# Altium PCB Copy of PCB1.PcbDoc
Units mil, origin at the board's own origin, x right, y up, seen from the top; angles counter-clockwise.
Board outline 3585 x 2640 mil, 4 copper layers (Top01, GND02, PWR03, Bottom04), stack 23.756 mil thick; 60 components, 129 nets, 692 pads, 66 vias.
Unrouted connection lines stored in the file: 367.
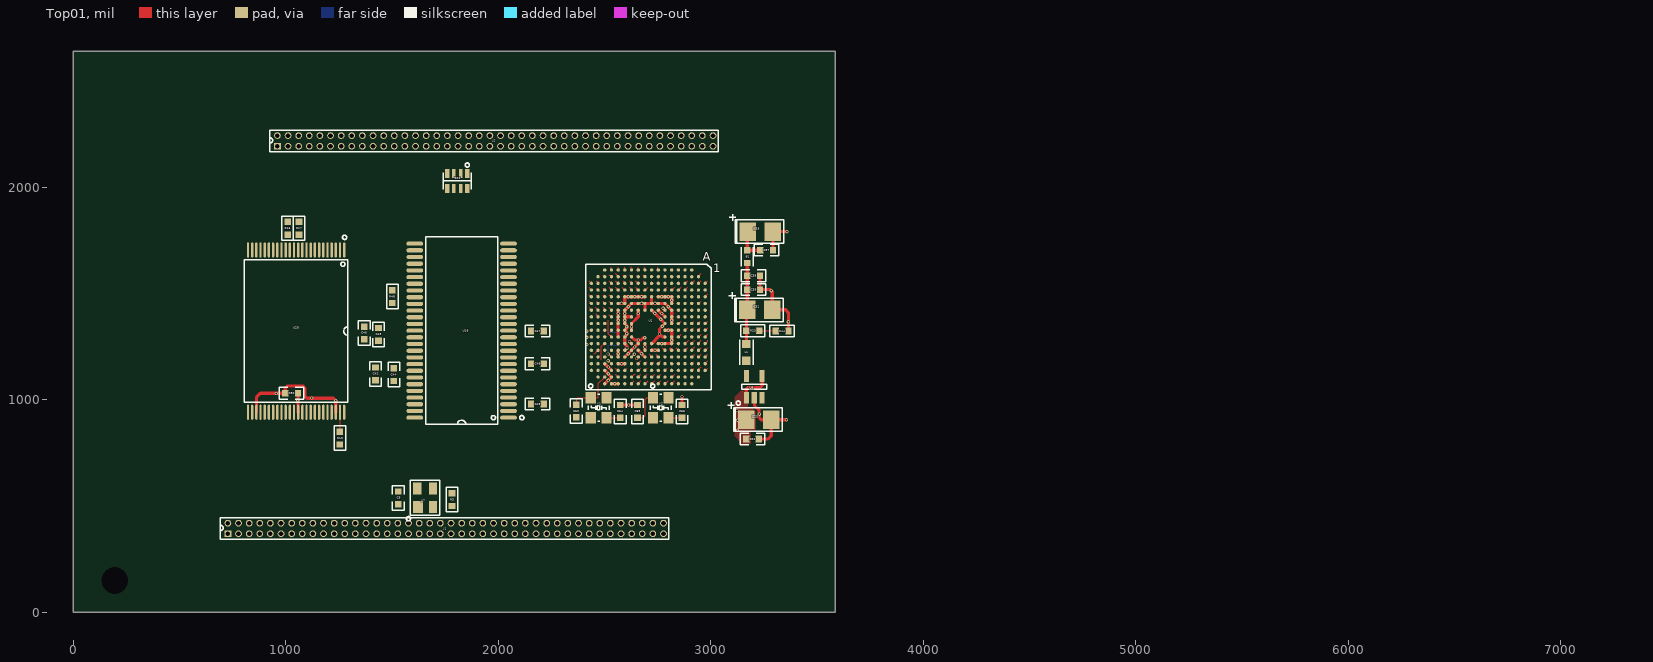
[diagram p0: Top01 view]
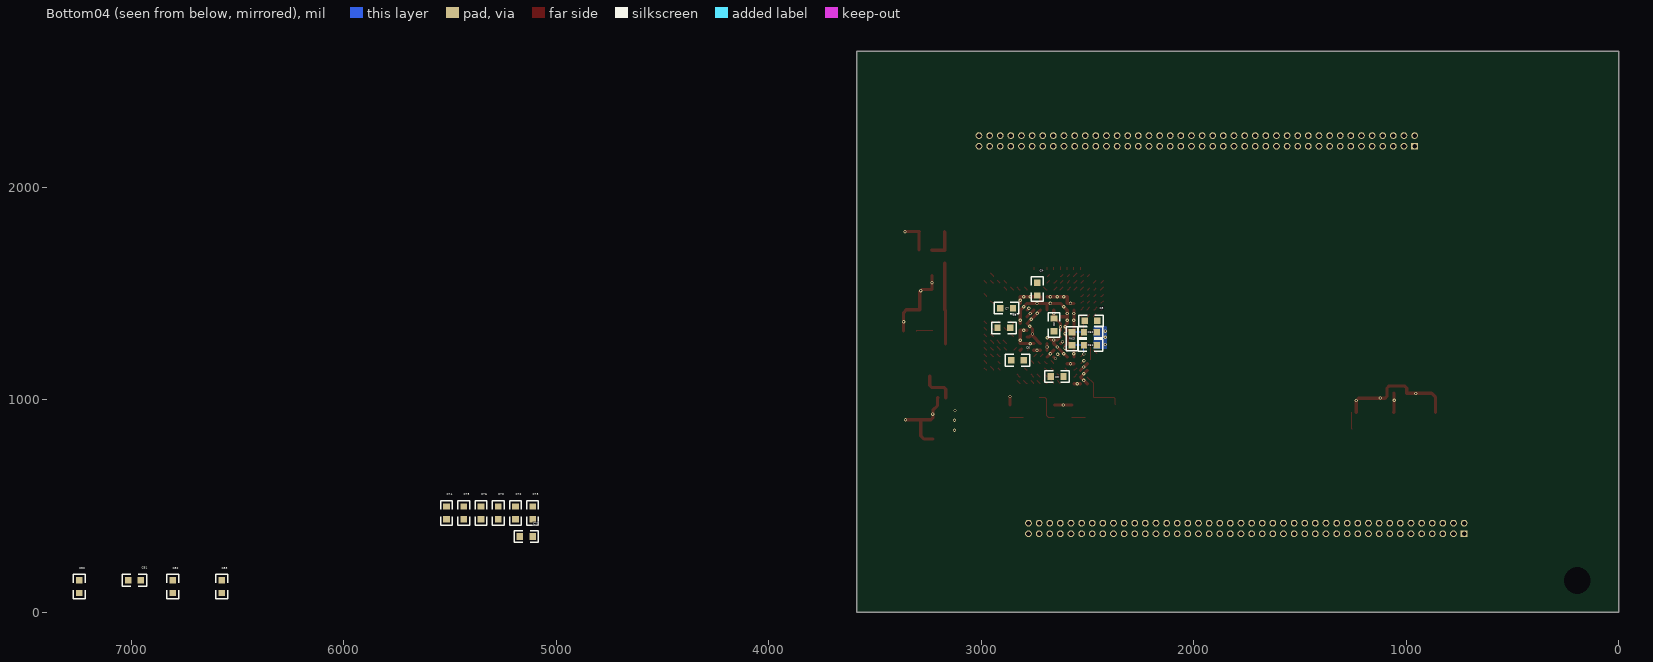
[diagram p1: Bottom04 view, seen from below]
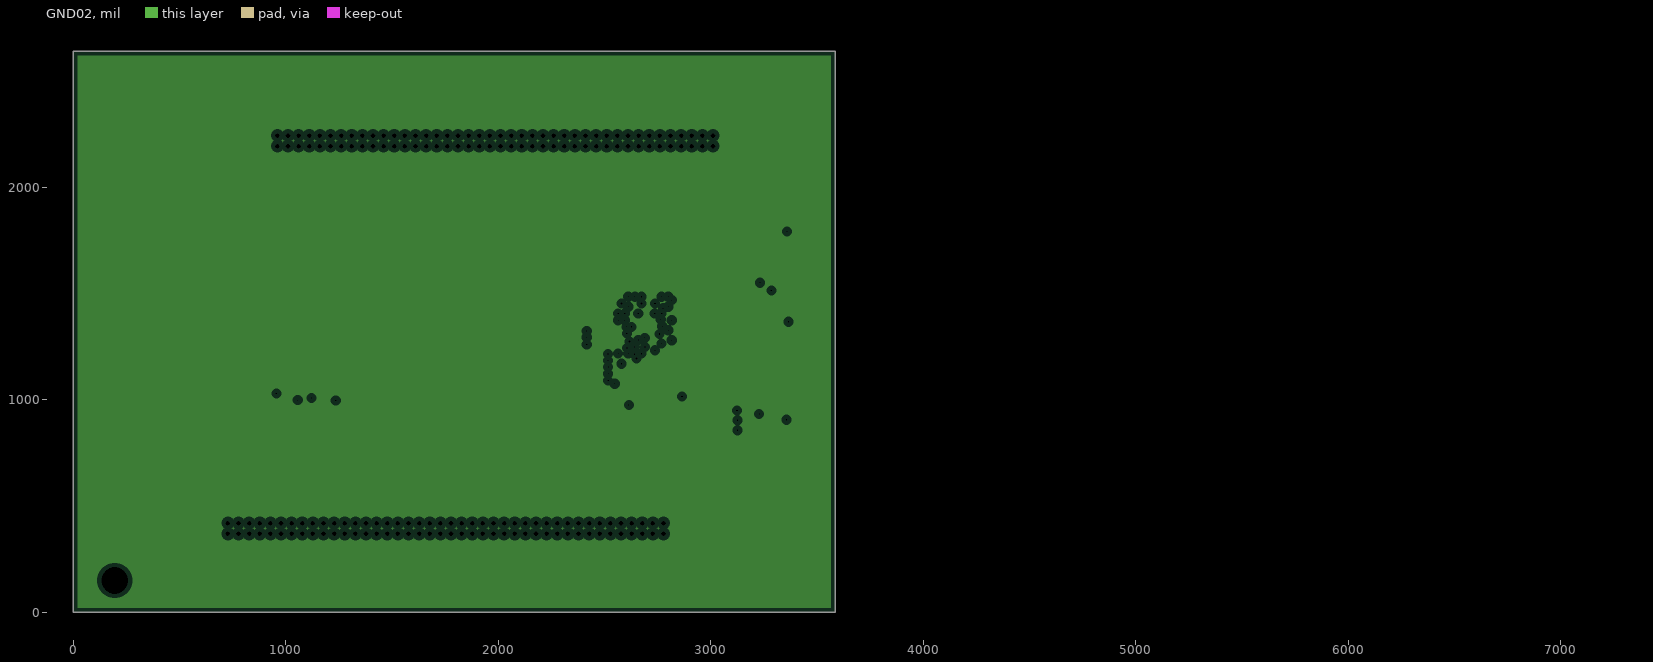
[diagram p2: GND02, clearances drawn from the general rule]
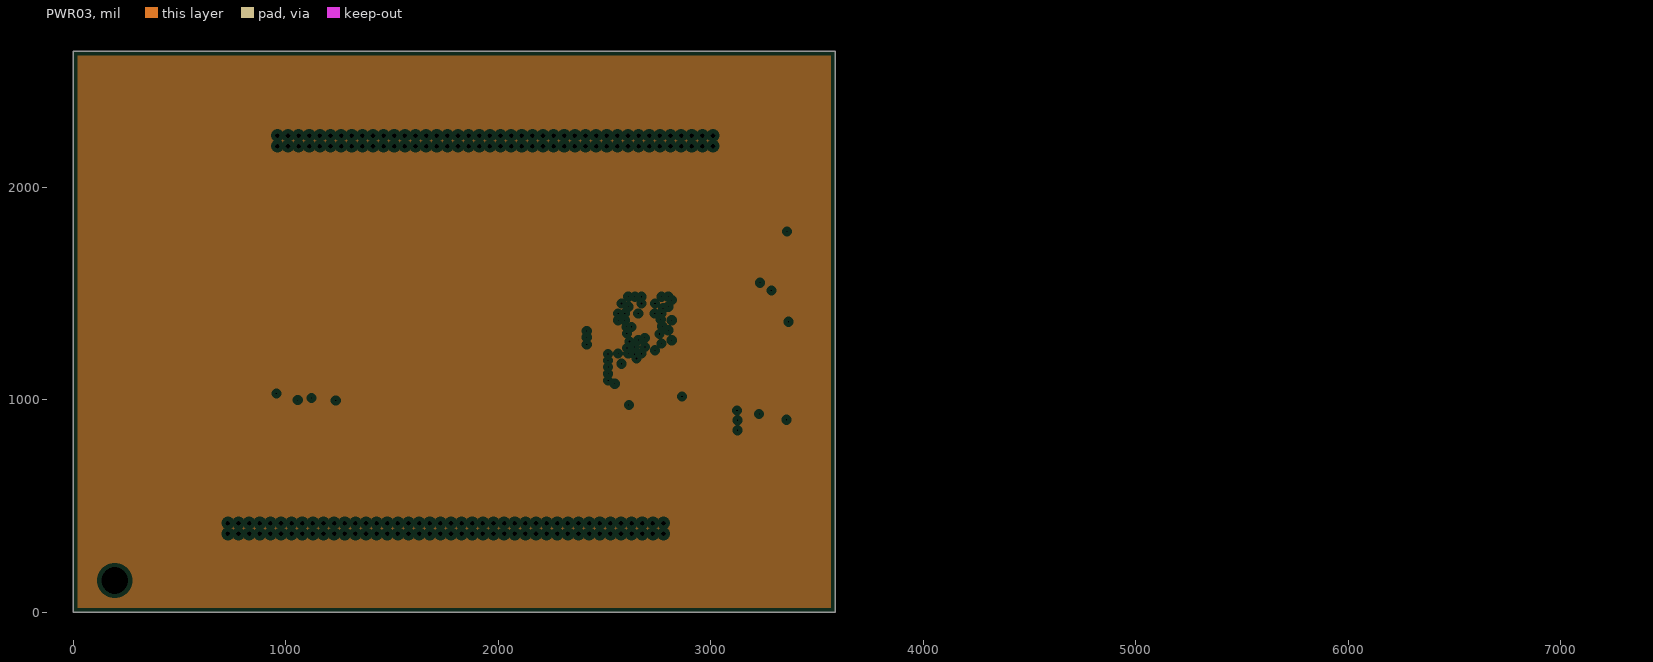
[diagram p3: PWR03, clearances drawn from the general rule]

## Layer stack, top to bottom
Top Solder: solder mask 0.4, Solder Resist, Dk 3.5
Top01: signal copper 1.4
Dielectric 2: prepreg 2.8, PP-006, Dk 4.1
GND02: plane copper 1.378
Dielectric 1: dielectric 12.6, FR-4, Dk 4.8
PWR03: plane copper 1.378
Dielectric 3: prepreg 2.8, PP-006, Dk 4.1
Bottom04: signal copper 1.4
Bottom Solder: solder mask 0.4, Solder Resist, Dk 3.5

## Board outline
0,0 0,2640 3585,2640 3585,0

## Design rules (kind name [scope] priority, off if disabled: settings)
Clearance PAD-PAD [All] p1: gap=5 ignorepadtopadclearanceinfootprint=TRUE
Clearance [All] p2: gap=0 ignorepadtopadclearanceinfootprint=FALSE
PlaneClearance [All] p1: clearance=20
PlaneConnect [All] p1: planeconnectstyle=Direct reliefexpansion=20 reliefentries=4 reliefconductorwidth=10 reliefairgap=10
PolygonConnect [All] p1: connectstyle=Direct reliefconductorwidth=10 reliefentries=4 polygonreliefangle="90 Angle" airgapwidth=10
RoutingVias [All] p1: holewidth=8 width=16 viastyle="Through Hole" minholewidth=8 minwidth=16 maxholewidth=8 maxwidth=16
SolderMaskExpansion [All] p1: expansion=4
Width PWR [InNetClass('PWR')] p1: maxlimit=40 minlimit=10 preferedwidth=15
Width [All] p2: maxlimit=10 minlimit=5 preferedwidth=5
28 further rules are at their usual default settings.

## Classes and differential pairs
net class PWR: 1V2 1V2_PLL 3V3 GND
net class D[0..31]: D0 D1 D2 D3 D4 D5 D6 D7 D8 D9 D10 D11 D12 D13 D14 D15 D16 D17 D18 D19 D20 D21 D22 D23 D24 D25 D26 D27 D28 D29 D30 D31
net class A[0..23]: A0 A1 A2 A3 A4 A5 A6 A7 A8 A9 A10 A11 A12 A13 A14 A15 A16 A17 A18 A19 A20 A21 A22 A23
component class SDRAM: C42 C44 C45 C46 C47 C48 C49 R48 U16
component class INTERFACE: B1 C9 C22 C23 C31 C33 C35 C37 C39 J1 J2 L1 R3 R23 R44 U7 U8
component class FLASH: C30 C63 C64 C65 C66 R15 R16 R17 U20 Y1 Y2
component class EMC: U1
component class CPU: RP1
component class 01: C61 C62 R63

## Components (designator, comment, footprint, x,y, rotation, side; value= is the part's Value field where it differs from the comment)
B1 "B" 0603 3171,1673.92 r90 top
C2 "104" 0603C 2657,1353 r90 bottom
C3 "104" 0603C 2483,1372 r180 bottom
C4 "104" 0603C 2736,1521 r90 bottom
C5 "104" 0603C 2893,1339 r180 bottom
C6 "104" 0603C 2829,1187 r180 bottom
C7 "104" 0603C 2880,1432 r180 bottom
C8 "104" 0603C 2641.92,1110 r180 bottom
C9 "104" 0603C 1529,539 r270 top
C22 "104" 0603C 3196,816 r0 top
C23 "22uF" TC-3528 3225.06,907 r0 top
C30 "104" 0603C 1027,1031 r180 top
C31 "10uF" TC-3528 3230.06,1424 r0 top
C33 "10uF" TC-3528 3232,1792 r0 top
C35 "103" 0603C 3200.92,1584 r0 top
C37 "104" 0603C 3262,1705 r0 top
C39 "104" 0603C 3200.92,1519 r0 top
C42 "104" 0603C 1421.56,1122.57 r90 top
C44 "103" 0603C 1508,1119.08 r90 top
C45 "104" 0603C 1435.51,1308.57 r90 top
C46 "104" 0603C 1369,1315.08 r90 top
C47 "104" 0603C 2183,1324 r0 top
C48 "104" 0603C 2183,1170 r0 top
C49 "104" 0603C 2183,981 r0 top
C61 "150pF 5%" 0603C 2486,1257 r180 bottom
C62 "3.9nF 5%" 0603C 2486,1319 r180 bottom
C63 "22pF" 0603C 2366,947.92 r270 top
C64 "22pF" 0603C 2573,946 r90 top
C65 "12pF" 0603C 2655,946 r90 top
C66 "12pF" 0603C 2864,946 r90 top
C70 "104" 0603C 5272.56,468.57 r90 bottom
C71 "104" 0603C 5140.43,357.62 r180 bottom
C72 "104" 0603C 5191.54,468.57 r90 bottom
C73 "104" 0603C 5110.51,468.57 r90 bottom
C74 "104" 0603C 5515.63,468.57 r90 bottom
C75 "104" 0603C 5434.61,468.57 r90 bottom
C76 "104" 0603C 5353.58,468.57 r90 bottom
C80 "104" 0603C 7244,121 r90 bottom
C81 "104" 0603C 6984,151 r180 bottom
C82 "104" 0603C 6804,121 r90 bottom
C83 "104" 0603C 6574,121 r90 bottom
J1 "CON_PLUG 42 x 2" DIP84 727,370 r90 top
J2 "CON_PLUG 42 x 2" DIP84 960,2194 r90 top
L1 "2.2uH" 0805 3167,1224 r90 top
R3 "470" 0603R 1782,531 r90 top
R15 "10K" 0603R 1254,820 r270 top
R16 "10K" 0603R 1008,1808 r90 top
R17 "10K" 0603R 1062,1808 r90 top
R23 "100K 1%" 0603R 3197,1325 r180 top
R44 "100K 1%" 0603R 3335,1324 r180 top
R48 "10K" 0603R 1501,1486.08 r90 top
R63 "120K 1%" 0603R 2572,1288 r90 bottom
RP1 "10K" PZ-4-0.8B 1806.25,2030.57 r180 top
U1 "LPC3250" TFBGA296 2705.21,1343.73 r270 top
U7 "MAX811" MAX811 1654.94,539.37 r0 top
U8 "SP6669" SOT-23-5 3204,1061 r0 top
U16 "HY57V561620CLT" TSSOP-54 1827,1326 r90 top
U20 "SST36VF1601" TSOP-48 1047.84,1323.89 r180 top
Y1 "13M" XTAL-D 2472,963 r270 top
Y2 "32.768K" XTAL-D 2764,963 r270 top

## Footprints (in the part's own frame and the unit in brackets; to place one, negate y for a bottom-side part, rotate by r counter-clockwise, add the part's x,y. Pads: shape width x height; smd on the part's side, far side on the other; paste and mask are expansions set on the pad)
0603 [mm]
  rect 0.76x0.8 smd: 1(-0.76,0) 2(0.76,0)
  silkscreen extent -1.15,-0.7 1.15,0.7
0603C [mm]
  rect 0.76x0.8 smd: 1(-0.76,0) 2(0.76,0)
  silkscreen extent -1.46,-0.7 1.46,0.7
0603R [mm]
  rect 0.76x0.8 smd: 1(-0.76,0) 2(0.76,0)
  silkscreen extent -1.46,-0.7 1.46,0.7
0805 [mm]
  rect 1x1 smd: 1(-1,0) 2(1,0)
  silkscreen extent -1.5,-0.8 1.5,0.8
DIP84 [mm]
  rect 0.8x0.8 hole 0.55: 1(0,0)
  round 0.8 hole 0.55: 2(1.27,0) 3(0,-1.27) 4(1.27,-1.27) 5(0,-2.54) 6(1.27,-2.54) 7(0,-3.81) 8(1.27,-3.81) 9(0,-5.08) 10(1.27,-5.08) 11(0,-6.35) 12(1.27,-6.35) 13(0,-7.62) 14(1.27,-7.62) 15(0,-8.89) 16(1.27,-8.89) 17(0,-10.16) 18(1.27,-10.16) 19(0,-11.43) 20(1.27,-11.43) 21(0,-12.7) 22(1.27,-12.7) 23(0,-13.97) 24(1.27,-13.97) 25(0,-15.24) 26(1.27,-15.24) 27(0,-16.51) 28(1.27,-16.51) 29(0,-17.78) 30(1.27,-17.78) 31(0,-19.05) 32(1.27,-19.05) 33(0,-20.32) 34(1.27,-20.32) 35(0,-21.59) 36(1.27,-21.59) 37(0,-22.86) 38(1.27,-22.86) 39(0,-24.13) 40(1.27,-24.13) 41(0,-25.4) 42(1.27,-25.4) 43(0,-26.67) 44(1.27,-26.67) 45(0,-27.94) 46(1.27,-27.94) 47(0,-29.21) 48(1.27,-29.21) 49(0,-30.48) 50(1.27,-30.48) 51(0,-31.75) 52(1.27,-31.75) 53(0,-33.02) 54(1.27,-33.02) 55(0,-34.29) 56(1.27,-34.29) 57(0,-35.56) 58(1.27,-35.56) 59(0,-36.83) 60(1.27,-36.83) 61(0,-38.1) 62(1.27,-38.1) 63(0,-39.37) 64(1.27,-39.37) 65(0,-40.64) 66(1.27,-40.64) 67(0,-41.91) 68(1.27,-41.91) 69(0,-43.18) 70(1.27,-43.18) 71(0,-44.45) 72(1.27,-44.45) 73(0,-45.72) 74(1.27,-45.72) 75(0,-46.99) 76(1.27,-46.99) 77(0,-48.26) 78(1.27,-48.26) 79(0,-49.53) 80(1.27,-49.53) 81(0,-50.8) 82(1.27,-50.8) 83(0,-52.07) 84(1.27,-52.07)
  silkscreen extent -0.64,-52.7 1.91,0.89
MAX811 [mm]
  rect 1.2x1.4 smd: 1(-0.85,-1.1)
  rect 1x1.4 smd: 2(0.95,-1.1) 3(0.95,1.1) 4(-0.95,1.1)
  silkscreen extent -2.23,-2.74 1.75,2.1
PZ-4-0.8B [mm]
  rect 0.5x1.1 smd: 1(-1.2,-0.9) 4(1.2,-0.9) 5(1.2,0.9) 8(-1.2,0.9)
  rect 0.4x1.1 smd: 2(-0.4,-0.9) 3(0.4,-0.9) 6(0.4,0.9) 7(-0.4,0.9)
  silkscreen extent -1.7,-2.15 1.7,1
SOT-23-5 [mm]
  rect 0.6x1.4 smd: 1(-0.95,-1.3) 2(0,-1.3) 3(0.95,-1.3) 4(0.95,1.3) 5(-0.95,1.3)
  silkscreen extent -2.15,-2.18 1.5,0.3
TC-3528 [mm]
  rect 2x2.2 smd: 1(-1.5,0) 2(1.5,0)
  silkscreen extent -3.7,-1.4 2.8,2.1
TFBGA296 [mm]
  round 0.4 smd: A3(-5.2,6.8) A4(-4.4,6.8) A5(-3.6,6.8) A6(-2.8,6.8) A7(-2,6.8) A8(-1.2,6.8) A9(-0.4,6.8) A10(0.4,6.8) A11(1.2,6.8) A12(2,6.8) A13(2.8,6.8) A14(3.6,6.8) A15(4.4,6.8) A16(5.2,6.8) B2(-6,6) B3(-5.2,6) B4(-4.4,6) B5(-3.6,6) B6(-2.8,6) B7(-2,6) B8(-1.2,6) B9(-0.4,6) B10(0.4,6) B11(1.2,6) B12(2,6) B13(2.8,6) B14(3.6,6) B15(4.4,6) B16(5.2,6) B17(6,6) C1(-6.8,5.2) C2(-6,5.2) C3(-5.2,5.2) C4(-4.4,5.2) C5(-3.6,5.2) C6(-2.8,5.2) C7(-2,5.2) C8(-1.2,5.2) C9(-0.4,5.2) C10(0.4,5.2) C11(1.2,5.2) C12(2,5.2) C13(2.8,5.2) C14(3.6,5.2) C15(4.4,5.2) C16(5.2,5.2) C17(6,5.2) C18(6.8,5.2) D1(-6.8,4.4) D2(-6,4.4) D3(-5.2,4.4) D4(-4.4,4.4) D5(-3.6,4.4) D6(-2.8,4.4) D7(-2,4.4) D8(-1.2,4.4) D9(-0.4,4.4) D10(0.4,4.4) D11(1.2,4.4) D12(2,4.4) D13(2.8,4.4) D14(3.6,4.4) D15(4.4,4.4) D16(5.2,4.4) D17(6,4.4) D18(6.8,4.4) E1(-6.8,3.6) E2(-6,3.6) E3(-5.2,3.6) E4(-4.4,3.6) E5(-3.6,3.6) E6(-2.8,3.6) E7(-2,3.6) E8(-1.2,3.6) E9(-0.4,3.6) E10(0.4,3.6) E11(1.2,3.6) E12(2,3.6) E13(2.8,3.6) E14(3.6,3.6) E15(4.4,3.6) E16(5.2,3.6) E17(6,3.6) E18(6.8,3.6) F1(-6.8,2.8) F2(-6,2.8) F3(-5.2,2.8) F4(-4.4,2.8) F5(-3.6,2.8) F6(-2.8,2.8) F7(-2,2.8) F8(-1.2,2.8) F9(-0.4,2.8) F10(0.4,2.8) F11(1.2,2.8) F12(2,2.8) F13(2.8,2.8) F14(3.6,2.8) F15(4.4,2.8) F16(5.2,2.8) F17(6,2.8) F18(6.8,2.8) G1(-6.8,2) G2(-6,2) G3(-5.2,2) G4(-4.4,2) G5(-3.6,2) G6(-2.8,2) G7(-2,2) G8(-1.2,2) G9(-0.4,2) G10(0.4,2) G11(1.2,2) G12(2,2) G13(2.8,2) G14(3.6,2) G15(4.4,2) G16(5.2,2) G17(6,2) G18(6.8,2) H1(-6.8,1.2) H2(-6,1.2) H3(-5.2,1.2) H4(-4.4,1.2) H5(-3.6,1.2) H6(-2.8,1.2) H7(-2,1.2) H12(2,1.2) H13(2.8,1.2) H14(3.6,1.2) H15(4.4,1.2) H16(5.2,1.2) H17(6,1.2) H18(6.8,1.2) J1(-6.8,0.4) J2(-6,0.4) J3(-5.2,0.4) J4(-4.4,0.4) J5(-3.6,0.4) J6(-2.8,0.4) J7(-2,0.4) J12(2,0.4) J13(2.8,0.4) J14(3.6,0.4) J15(4.4,0.4) J16(5.2,0.4) J17(6,0.4) J18(6.8,0.4) K1(-6.8,-0.4) K2(-6,-0.4) K3(-5.2,-0.4) K4(-4.4,-0.4) K5(-3.6,-0.4) K6(-2.8,-0.4) K7(-2,-0.4) K12(2,-0.4) K13(2.8,-0.4) K14(3.6,-0.4) K15(4.4,-0.4) K16(5.2,-0.4) K17(6,-0.4) K18(6.8,-0.4) L1(-6.8,-1.2) L2(-6,-1.2) L3(-5.2,-1.2) L4(-4.4,-1.2) L5(-3.6,-1.2) L6(-2.8,-1.2) L7(-2,-1.2) L12(2,-1.2) L13(2.8,-1.2) L14(3.6,-1.2) L15(4.4,-1.2) L16(5.2,-1.2) L17(6,-1.2) L18(6.8,-1.2) M1(-6.8,-2) M2(-6,-2) M3(-5.2,-2) M4(-4.4,-2) M5(-3.6,-2) M6(-2.8,-2) M7(-2,-2) M8(-1.2,-2) M9(-0.4,-2) M10(0.4,-2) M11(1.2,-2) M12(2,-2) M13(2.8,-2) M14(3.6,-2) M15(4.4,-2) M16(5.2,-2) M17(6,-2) M18(6.8,-2) N1(-6.8,-2.8) N2(-6,-2.8) N3(-5.2,-2.8) N4(-4.4,-2.8) N5(-3.6,-2.8) N6(-2.8,-2.8) N7(-2,-2.8) N8(-1.2,-2.8) N9(-0.4,-2.8) N10(0.4,-2.8) N11(1.2,-2.8) N12(2,-2.8) N13(2.8,-2.8) N14(3.6,-2.8) N15(4.4,-2.8) N16(5.2,-2.8) N17(6,-2.8) N18(6.8,-2.8) P1(-6.8,-3.6) P2(-6,-3.6) P3(-5.2,-3.6) P4(-4.4,-3.6) P5(-3.6,-3.6) P6(-2.8,-3.6) P7(-2,-3.6) P8(-1.2,-3.6) P9(-0.4,-3.6) P10(0.4,-3.6) P11(1.2,-3.6) P12(2,-3.6) P13(2.8,-3.6) P14(3.6,-3.6) P15(4.4,-3.6) P16(5.2,-3.6) P17(6,-3.6) P18(6.8,-3.6) R1(-6.8,-4.4) R2(-6,-4.4) R3(-5.2,-4.4) R4(-4.4,-4.4) R5(-3.6,-4.4) R6(-2.8,-4.4) R7(-2,-4.4) R8(-1.2,-4.4) R9(-0.4,-4.4) R10(0.4,-4.4) R11(1.2,-4.4) R12(2,-4.4) R13(2.8,-4.4) R14(3.6,-4.4) R15(4.4,-4.4) R16(5.2,-4.4) R17(6,-4.4) R18(6.8,-4.4) T1(-6.8,-5.2) T2(-6,-5.2) T3(-5.2,-5.2) T4(-4.4,-5.2) T5(-3.6,-5.2) T6(-2.8,-5.2) T7(-2,-5.2) T8(-1.2,-5.2) T9(-0.4,-5.2) T10(0.4,-5.2) T11(1.2,-5.2) T12(2,-5.2) T13(2.8,-5.2) T14(3.6,-5.2) T15(4.4,-5.2) T16(5.2,-5.2) T17(6,-5.2) T18(6.8,-5.2) U2(-6,-6) U3(-5.2,-6) U4(-4.4,-6) U5(-3.6,-6) U6(-2.8,-6) U7(-2,-6) U8(-1.2,-6) U9(-0.4,-6) U10(0.4,-6) U11(1.2,-6) U12(2,-6) U13(2.8,-6) U14(3.6,-6) U15(4.4,-6) U16(5.2,-6) U17(6,-6) V3(-5.2,-6.8) V4(-4.4,-6.8) V5(-3.6,-6.8) V6(-2.8,-6.8) V7(-2,-6.8) V8(-1.2,-6.8) V9(-0.4,-6.8) V10(0.4,-6.8) V11(1.2,-6.8) V12(2,-6.8) V13(2.8,-6.8) V14(3.6,-6.8) V15(4.4,-6.8) V16(5.2,-6.8)
  silkscreen extent -7.5,-7.5 7.5,7.5
TSOP-48 [mm]
  oval 0.28x1.8 smd: 1(-5.75,-9.7) 2(-5.25,-9.7) 3(-4.75,-9.7) 4(-4.25,-9.7) 5(-3.75,-9.7) 6(-3.25,-9.7) 7(-2.75,-9.7) 8(-2.25,-9.7) 9(-1.75,-9.7) 10(-1.25,-9.7) 11(-0.75,-9.7) 12(-0.25,-9.7) 13(0.25,-9.7) 14(0.75,-9.7) 15(1.25,-9.7) 16(1.75,-9.7) 17(2.25,-9.7) 18(2.75,-9.7) 19(3.25,-9.7) 20(3.75,-9.7) 21(4.25,-9.7) 22(4.75,-9.7) 23(5.25,-9.7) 24(5.75,-9.7) 25(5.75,9.7) 26(5.25,9.7) 27(4.75,9.7) 28(4.25,9.7) 29(3.75,9.7) 30(3.25,9.7) 31(2.75,9.7) 32(2.25,9.7) 33(1.75,9.7) 34(1.25,9.7) 35(0.75,9.7) 36(0.25,9.7) 37(-0.25,9.7) 38(-0.75,9.7) 39(-1.25,9.7) 40(-1.75,9.7) 41(-2.25,9.7) 42(-2.75,9.7) 43(-3.25,9.7) 44(-3.75,9.7) 45(-4.25,9.7) 46(-4.75,9.7) 47(-5.25,9.7) 48(-5.75,9.7)
  silkscreen extent -6.2,-11.45 6.2,8.5
TSSOP-54 [mm]
  oval 0.5x2 smd: 1(-10.4,-5.6) 2(-9.6,-5.6) 3(-8.8,-5.6) 4(-8,-5.6) 5(-7.2,-5.6) 6(-6.4,-5.6) 7(-5.6,-5.6) 8(-4.8,-5.6) 9(-4,-5.6) 10(-3.2,-5.6) 11(-2.4,-5.6) 12(-1.6,-5.6) 13(-0.8,-5.6) 14(0,-5.6) 15(0.8,-5.6) 16(1.6,-5.6) 17(2.4,-5.6) 18(3.2,-5.6) 19(4,-5.6) 20(4.8,-5.6) 21(5.6,-5.6) 22(6.4,-5.6) 23(7.2,-5.6) 24(8,-5.6) 25(8.8,-5.6) 26(9.6,-5.6) 27(10.4,-5.6) 28(10.4,5.6) 29(9.6,5.6) 30(8.8,5.6) 31(8,5.6) 32(7.2,5.6) 33(6.4,5.6) 34(5.6,5.6) 35(4.8,5.6) 36(4,5.6) 37(3.2,5.6) 38(2.4,5.6) 39(1.6,5.6) 40(0.8,5.6) 41(0,5.6) 42(-0.8,5.6) 43(-1.6,5.6) 44(-2.4,5.6) 45(-3.2,5.6) 46(-4,5.6) 47(-4.8,5.6) 48(-5.6,5.6) 49(-6.4,5.6) 50(-7.2,5.6) 51(-8,5.6) 52(-8.8,5.6) 53(-9.6,5.6) 54(-10.4,5.6)
  silkscreen extent -11.2,-7.45 11.2,4.3
XTAL-D [mm]
  rect 1.4x1.2 smd: 1(-1.2,-0.95) 2(1.2,0.95) 3(1.2,-0.95) 4(-1.2,0.95)
  silkscreen extent -2.84,-1.25 1.6,1.25

## Part data
C2 C3 C4 C5 C6 C7 C8 C9 C22 C30 C35 C37 C39 C42 C44 C45 C46 C47 C48 C49 C61 C62 C63 C64 C65 C66 C70 C71 C72 C73 C74 C75 C76 C80 C81 C82 C83: library part CAP
C23 C31 C33: library part CAP_1
L1: library part INDUCTOR
R3 R15 R16 R17 R23 R44 R48 R63: library part RES
RP1: library part RP
Y1 Y2: library part Y

## Free pads (board coordinates)
  round 0 hole 125.98: 67(195,150)

## Via types
v1: diameter 16, hole 8, Top01 to Bottom04, tented both sides, 66 vias

## Nets (pads, with @x,y where several pads share a name; then routed paths per layer and width w, separated by ;. In a path a pad name is that pad's centre, name@x,y a point inside that pad or via, vN(x,y) a via of type N, cw(c..) or ccw(c..) an arc to the next point about the centre after c; other vN are vias at no path point)
1V2: B1.1 C31.1 C35.1 C39.1 C70.1 C71.1 C72.1 C73.1 C74.1 C75.1 C76.1 L1.2 R23.2 U1.G7 U1.G9 U1.G11 U1.J7 U1.J12 U1.L12 U1.M7 U1.M11 U1.M13 U1.N14 | length 814.9
  Top01 w15: U1.N14 v1(2610.72,1217.75) U1.M13 v1(2642.21,1249.24) U1.L12 v1(2657.96,1281.96) ; U1.M11 2640.99,1281.96 v1(2657.96,1281.96) ; v1(2689,1292) 2681,1292 2670.96,1281.96 v1(2657.96,1281.96) ; U1.J12@2720.81,1265.14 U1.J12 2757.81,1301.85 2757.81,1309.81 v1(2758,1310) ; U1.J7 2764.21,1379.21 U1.G9 v1(2771.07,1346.6) 2758.19,1333.73 2758.19,1310.19 v1(2758,1310) ; v1(2775,1431) 2775.22,1431 2783.74,1422.47 U1.G7 ; U1.G11 2771.51,1296.49 v1(2758,1310) ; L1.2 L1.2 3167.04,1324.96 R23.2 3167.08,1420.08 C31.1 C39.1 C35.1 B1.1
  other v1: 2764,1379 2736,1407
1V2_PLL: B1.2 C33.1 C37.1 C80.1 C81.1 C82.1 C83.1 U1.K14 U1.L13 U1.N15 U1.P15 U1.R17 U1.T16 U1.T18 | length 315.6
  Top01 w15: U1.T18 v1(2516.23,1091.76) U1.R17 U1.T16 ; U1.P15 v1(2579.22,1170.5) U1.N15 ; U1.L13 U1.K14 ; C33.1 3171,1790.06 B1.2 3171.58,1704.42 3231.5,1704.42 C37.1
  other v1: 2516.23,1123.26 2673.71,1217.75
3V3: C2.1 C3.1 C4.1 C5.1 C6.1 C7.1 C8.1 C9.1 C22.1 C23.1 C30.1 C42.1 C44.1 C45.1 C46.1 C47.1 C48.1 C49.1 J1.81 J1.82 J1.83 J1.84 R15.2 R16.2 R17.2 RP1.5 RP1.6 RP1.7 RP1.8 U1.F7 U1.F8 U1.F9 U1.F13 U1.G6 U1.H6 U1.H13 U1.J5 U1.J6 U1.J13 U1.K6 U1.K7 U1.L6 U1.M6 U1.M8 U1.N7 U1.N8 U1.N9 U1.N10 U1.N11 U1.N12 U1.N13 U7.4 U8.1 U8.4 U16.1 U16.3 U16.9 U16.14 U16.27 U16.43 U16.49 U20.37 | length 914.5
  Top01 w15: C30.1 1057.3,1030.62 1057.3,942.38 U20.37 ; U1.N13 2594.97,1233.7 2605,1243.73 v1(2605,1244) 2604.81,1244.19 2604.81,1254.95 2594.97,1264.79 U1.N12 U1.N11 2595.17,1296.49 2604.6,1305.92 v1(2604.6,1312.14) 2604.6,1318.35 U1.N10 2594.97,1328.19 2604.4,1337.62 v1(2604.4,1343.83) 2604.4,1350.05 U1.N9 v1(2594.97,1375.23) U1.N8 ; U1.M8 U1.N8 ; U1.K7 U1.K6 ; U1.J13 v1(2736.7,1233.5) U1.H13 ; U1.J5 U1.J6 ; 2810,1240 2810,1239.14 2815.44,1233.7 U1.F13 ; U1.F9 v1(2815.44,1375.23) U1.F8 U1.F7 U1.G6 U1.H6 v1(2736.7,1453.97) U1.J6 ; U8.1 3166.6,1050.21 3175.39,1059 3233.21,1059 3242,1067.79 3242,1111.58 U8.4 ; U1.N8 v1(2594.97,1406.72) U1.N7 v1(2610.72,1438.22) U1.M6 U1.L6 v1(2673.71,1453.97) U1.K6 ; U1.K6 U1.J6
  other v1: 3125,857 3125,904 3123,950 1056,999 2799.69,1438.22
A0: U1.L3 U16.23 U20.25 | length 17.7
  Top01 w5: 2645,1560 2656.54,1548.46 U1.L3
A1: U1.L4 U16.24 U20.24 | length 18.4
  Top01 w5: 2645,1530 U1.L4 U1.L4
A2: U1.M1 U16.25 U20.23 | length 14.7
  Top01 w5: 2626,1626 2626,1611.91 U1.M1
A3: U1.M2 U16.26 U20.22 | length 15.6
  Top01 w5: 2615,1590 2625.05,1579.95 U1.M2
A4: U1.M3 U16.29 U20.21 | length 16.3
  Top01 w5: 2615,1560 U1.M3 U1.M3
A5: U1.N1 U16.30 U20.20 | length 13.6
  Top01 w5: U1.N1@2595,1611.48 2595,1625
A6: U1.N2 U16.31 U20.19 | length 14.2
  Top01 w5: 2585,1590 U1.N2 U1.N2
A7: U1.N3 U16.32 U20.18 | length 15.7
  Top01 w5: 2585,1560 2594.97,1550.03 U1.N3
A8: U1.M4 U16.33 U20.8 | length 17.8
  Top01 w5: 2615,1530 2626.46,1518.54 U1.M4
A9: U1.P1 U16.34 U20.7 | length 13.7
  Top01 w5: 2563,1625 2563,1611.92 U1.P1
A10: U1.P2 U16.22 U20.6 | length 20.6
  Top01 w5: 2550,1595 2563.47,1581.53 U1.P2
A11: U1.P3 U16.35 U20.5 | length 18.3
  Top01 w5: 2550,1560 2561.54,1548.46 U1.P3
A12: U1.N4 U16.36 U20.4 | length 20.4
  Top01 w5: 2580,1530 2593.04,1516.96 U1.N4
A13: U1.R1 U16.20 U20.3 | length 13.6
  Top01 w5: U1.R1@2532,1611.47 2532,1625
A14: U1.R2 U16.21 U20.2 | length 16.1
  Top01 w5: 2520,1590 2530.05,1579.95 U1.R2
A15: U1.L1 U20.1 | length 12.9
  Top01 w5: 2657,1624 2657,1612.41 U1.L1
A16: U1.K3 U20.48 | length 15.5
  Top01 w5: 2680,1560 2689.46,1550.54 U1.K3
A17: U1.K4 U20.17 | length 20.9
  Top01 w5: U1.K4 2691.96,1516.96 2705,1530
A18: U1.K2 U20.16 | length 14
  Top01 w5: 2680,1590 2689.46,1580.54 U1.K2
A19: U1.K1 U20.9 | length 13.7
  Top01 w5: 2689,1625 2689,1611.91 U1.K1
D0: U1.U4 U16.2 U20.29 | length 12.3
  Top01 w5: 2460,1525 2468.04,1516.96 U1.U4
D1: U1.R7 U16.4 U20.31 | length 17.5
  Top01 w5: 2520,1435 2531.98,1423.02 U1.R7
D2: U1.T5 U16.5 U20.33 | length 14.4
  Top01 w5: 2490,1495 2499.54,1485.46 U1.T5
D3: U1.U5 U16.7 U20.35 | length 13.3
  Top01 w5: 2460,1495 2468.98,1486.02 U1.U5
D4: U1.V3 U16.8 U20.38 | length 17.3
  Top01 w5: 2425,1560 2436.54,1548.46 U1.V3
D5: U1.V4 U16.10 U20.40 | length 18.2
  Top01 w5: 2425,1530 2437.49,1517.51 U1.V4
D6: U1.T6 U16.11 U20.42 | length 15.4
  Top01 w5: 2490,1465 2500.48,1454.52 U1.T6
D7: U1.R8 U16.13 U20.44 | length 15.7
  Top01 w5: 2520.04,1400 2529.07,1390.98 U1.R8
D8: U1.V5 U16.42 U20.30 | length 16.4
  Top01 w5: 2425,1495 2425.28,1495 2434.82,1485.46 U1.V5
D9: U1.U6 U16.44 U20.32 | length 14.8
  Top01 w5: 2460,1465 2468.98,1456.02 U1.U6
D10: U1.V6 U16.45 U20.34 | length 17.1
  Top01 w5: 2425,1465 2436.03,1453.97 U1.V6
D11: U1.T7 U16.47 U20.36 | length 16.9
  Top01 w5: 2490,1435 2500.48,1424.52 U1.T7
D12: U1.U7 U16.48 U20.39 | length 19.2
  Top01 w5: 2455,1435 2467.53,1422.47 U1.U7
D13: U1.V7 U16.50 U20.41 | length 17.7
  Top01 w5: 2425,1435 U1.V7
D14: U1.T8 U16.51 U20.43 | length 14.2
  Top01 w5: 2490,1400 2499.02,1390.98 U1.T8
D15: U1.U8 U16.53 U20.45 | length 17.7
  Top01 w5: 2460,1405 2460,1402.87 2468.98,1393.89 U1.U8
GND: C2.2 C3.2 C4.2 C5.2 C6.2 C7.2 C8.2 C9.2 C22.2 C23.2 C30.2 C31.2 C33.2 C35.2 C37.2 C39.2 C42.2 C44.2 C45.2 C46.2 C47.2 C48.2 C49.2 C61.2 C62.2 C63.2 C64.2 C65.2 C66.2 C70.2 C71.2 C72.2 C73.2 C74.2 C75.2 C76.2 C80.2 C81.2 C82.2 C83.2 J1.1 J1.2 J1.3 J1.4 J1.5 J1.6 J1.7 J1.8 J1.9 J1.10 J1.11 J1.12 J1.13 J1.14 J1.15 J1.16 J1.17 J1.18 J1.19 J1.20 J1.21 J1.22 J1.23 J1.24 J1.25 J1.26 J1.27 J1.28 J1.29 J1.30 J1.32 J1.33 J1.36 J1.41 J1.43 J1.47 J1.48 J1.49 J1.50 J1.51 J1.52 J1.53 J1.54 J1.55 J1.56 J1.79 J2.1 J2.2 J2.3 J2.4 J2.5 J2.6 J2.7 J2.8 J2.9 J2.10 J2.11 J2.12 J2.13 J2.14 J2.15 J2.16 J2.17 J2.18 J2.19 J2.20 J2.21 J2.22 J2.23 J2.24 J2.25 J2.26 J2.29 J2.30 J2.34 J2.36 J2.42 J2.45 J2.46 J2.48 J2.52 J2.54 J2.55 J2.56 J2.57 J2.58 J2.59 J2.60 J2.61 J2.62 J2.63 J2.64 J2.67 J2.71 J2.72 J2.73 J2.77 R44.1 R48.2 U1.F5 U1.F6 U1.F10 U1.F11 U1.F12 U1.G5 U1.G8 U1.G10 U1.G12 U1.H5 U1.H7 U1.H12 U1.K5 U1.K12 U1.K13 U1.L5 U1.L7 U1.L14 U1.M5 U1.M9 U1.M10 U1.M12 U1.N5 U1.N6 U1.P6 U1.P7 U1.P8 U1.P9 U1.P10 U1.P11 U1.P13 U1.P14 U1.P18 U1.R16 U1.R18 U1.T15 U7.1 U8.2 U16.6 U16.12 U16.28 U16.41 U16.46 U16.52 U16.54 U20.27 U20.46 | length 2472.6
  Top01 w15: U20.27 860.83,1011.83 880,1031 C30.2 997.08,1056.08 1006,1065 1081.21,1065 1090,1056.21 1090,1016.79 1098.79,1008 1224,1008 v1(1234.85,997.15) U20.46 ; U1.T15 U1.R16 ; U1.R18 v1(2547.72,1076.02) U1.P18 ; U1.P14 v1(2563.47,1217.75) U1.P13 ; U1.P11 U1.P10 U1.P9 v1(2563.47,1375.23) U1.P8 v1(2563.47,1406.72) U1.P7 ; U1.P6 v1(2579.22,1453.97) U1.N6 U1.N5 v1(2610.72,1485.46) U1.M5 v1(2642.21,1485.46) U1.L5 v1(2673.71,1485.46) U1.K5 ; C64.2 C65.2 ; v1@2617,1275 v1(2617,1274.66) 2626.46,1265.19 U1.M12 ; U1.M10 v1(2626.46,1343.73) U1.M9 2657.96,1390.98 v1(2657.96,1406.72) U1.L7 ; v1(2650,1195) 2650.76,1195 2657.76,1202 U1.L14 ; U1.K13 v1(2689.46,1249.24) U1.K12 ; U1.H12 v1(2768.2,1264.99) U1.G12 U1.F12 v1(2815.44,1280.74) U1.F11 U1.F10 v1(2799.69,1327.98) U1.G10 ; U1.H5 v1(2768.2,1485.46) U1.G5 v1(2799.69,1485.46) U1.F5 v1(2815.44,1469.72) U1.F6 ; U1.H7@2752.65,1422.47 U1.H7 U1.G8 ; C66.2 v1(2864,1016) ; U8.2 3205,1008.82 3205,973 3227,951 v1(3227,933.39) 3227,915.79 3235.79,907 C23.2 ; C22.2 3269,816 3284.11,831.11 C23.2 ; C35.2 v1(3230.84,1551.5) C39.2 3280,1519 v1(3284.56,1514.44) 3289.11,1509.89 C31.2 3352,1424 3364.92,1411.08 v1(3364.92,1367.54) R44.1 ; C37.2 3291.92,1791.13 C33.2 v1(3358,1792) ; v1(3356,907) C23.2
  other v1: 2614,975.92 1121,1009 955,1030 2516.23,1154.76 2416,1261 2416,1295 2416,1324 2768.2,1406.72
GPI_00: J1.73 U1.C16 | length 15.2
  Top01 w5: U1.C16 2909.93,1139.93 2920,1150
GPI_02: J2.70 U1.C14 | length 20.5
  Top01 w5: U1.C14 2912,1202 2925,1215
GPI_03: J2.28 U1.F4 | length 20
  Top01 w5: U1.F4 2816.96,1516.96 2830,1530
GPI_04: J1.76 U1.E13 | length 16.7
  Top01 w5: 2835,1245 2846.5,1233.5 U1.E13
GPI_05: J1.38 U1.N16 | length 15.1
  Top01 w5: U1.N16 2594.97,1139.97 2605,1150
GPI_07: J2.69 U1.D13 | length 16.3
  Top01 w5: U1.D13 2878.5,1233.5 2890,1245
GPI_08: J1.77 U1.B16 | length 21.6
  Top01 w5: U1.B16 2941.43,1141.43 2955,1155
GPI_16: J1.59 U1.J18 | length 19.8
  Top01 w5: U1.J18 U1.J18 2735,1090
GPI_22: J1.74 U1.G13 | length 18.7
  Top01 w5: 2770,1245 2781.5,1233.5 U1.G13
GPIO_00: J2.80 U1.A12 | length 20
  Top01 w5: U1.A12 2985,1277.07 2985,1280
GPIO_01: J2.78 U1.A11 | length 18.5
  Top01 w5: U1.A11 2972.92,1297.92 2985,1310
GPO_00: J2.33 U1.C3 | length 19.9
  Top01 w5: U1.C3 2921.47,1560 2925,1560
GPO_01: J2.39 U1.D4 | length 17.8
  Top01 w5: U1.D4 2878.43,1518.43 2890,1530
GPO_02: J2.83 U1.B14 | length 19
  Top01 w5: U1.B14 2942,1202 2955,1215
GPO_03: J2.66 U1.D12 | length 22.8
  Top01 w5: U1.D12 2879.99,1264.99 2895,1280
GPO_05: J2.37 U1.B3 | length 18.4
  Top01 w5: U1.B3 2943.46,1548.46 2955,1560
GPO_06: J1.78 U1.A16 | length 16.6
  Top01 w5: U1.A16 2974.01,1139.01 2985,1150
GPO_07: J1.80 U1.A15 | length 19.5
  Top01 w5: U1.A15 2972.92,1172.92 2985,1185
GPO_08: J2.68 U1.C13 | length 22.7
  Top01 w5: U1.C13 2909.93,1234.93 2925,1250
GPO_09: J2.65 U1.C12 | length 21.3
  Top01 w5: U1.C12 2909.99,1264.99 2925,1280
GPO_10: J2.53 U1.E11 | length 18.9
  Top01 w5: U1.E11 2846.94,1296.94 2860,1310
GPO_12: J2.79 U1.B12 | length 20.6
  Top01 w5: U1.B12 2941.43,1266.43 2955,1280
GPO_13: J2.81 U1.B13 | length 18.3
  Top01 w5: U1.B13 2943.5,1233.5 2955,1245
GPO_14: J2.32 U1.D3 | length 16.3
  Top01 w5: U1.D3@2878.46,1548.46 2890,1560
GPO_15: J2.84 U1.A14 | length 18
  Top01 w5: U1.A14 2972.92,1202.92 2985,1215
GPO_16: J2.49 U1.D10 | length 16.8
  Top01 w5: U1.D10 2878.43,1328.43 2890,1340
GPO_20: J2.35 U1.B2 | length 20.7
  Top01 w5: U1.B2 2941.43,1581.43 2955,1595
LDQM0: U1.R3 U16.15 | length 16.8
  Top01 w5: 2520,1560 2531.54,1548.46 U1.R3
LDQM1: U1.P4 U16.39 | length 18.9
  Top01 w5: 2550,1530 2563.04,1516.96 U1.P4
LnSDCAS: U1.R5 U16.17 | length 15.9
  Top01 w5: 2520,1495 2529.54,1485.46 U1.R5
LnSDCS0: U1.R6 U16.19 | length 16.5
  Top01 w5: 2520,1465 2531.03,1453.97 U1.R6
LnSDRAS: U1.T2 U16.18 | length 14.6
  Top01 w5: 2490,1590 2500.05,1579.95 U1.T2
MISO0: J2.51 U1.C10 | length 16.2
  Top01 w5: U1.C10 2909.93,1329.93 2920,1340
MISO1: J2.76 U1.A10 | length 17.1
  Top01 w5: U1.A10 2972.98,1327.98 2985,1340
MOSI0: J2.43 U1.B9 | length 14.1
  Top01 w5: U1.B9 2941.43,1361.43 2950,1370
MOSI1: J2.44 U1.A9 | length 16.4
  Top01 w5: U1.A9 2974.48,1359.48 2985,1370
nCS0: U1.U13 U20.26 | length 24.9
  Top01 w5: 2453,1218 2468.5,1233.5 U1.U13 U1.U13@2468.98,1231.02
nCS1: J1.34 U1.R11 | length 86.5
  Top01 w5: 2516,1374 2516,1311 2530.51,1296.49 U1.R11 U1.R11@2533.51,1296.49
nCS2: J1.31 U1.T12 | length 85.3
  Top01 w5: 2485,1188 2485,1252 2497.99,1264.99 U1.T12 U1.T12@2500.48,1264.52
NetC61_1: C61.1 R63.1 U1.R14 | length 119.3
  Top01 w5: v1(2516,1216) 2530,1202 U1.R14
  Bottom04 w5: v1(2516,1216) 2516,1256.92 C61.1 2570.92,1257 R63.1
NetC62_1: C62.1 R63.2 | length 56.5
  Bottom04 w5: C62.1 2517,1317.92 R63.2
NetC63_1: C63.1 U1.T17 Y1.1 | length 241.5
  Top01 w5: C63.1 2368,979.84 2368,1006 2372.24,1010.24 Y1.1 2468.07,1010.24 2471,1013.17 2471,1078.03 U1.T17
NetC64_1: C64.1 U1.R15 Y1.2 | length 85.7
  Top01 w5: Y1.2 2572.68,915.76 C64.1 ; v1(2516,1185) 2530.5,1170.5 U1.R15
NetC65_1: C65.1 U1.P16 Y2.1 | length 174.5
  Top01 w5: 2550,1150 2560.99,1139.01 U1.P16 ; C65.1 2681.08,916.08 2690,925 2690,1003.32 2696.93,1010.24 Y2.1
NetC66_1: C66.1 U1.P17 Y2.2 | length 81.4
  Top01 w5: 2550,1120 2562.49,1107.51 U1.P17 ; Y2.2 2863.68,915.76 C66.1
NetL1_1: L1.1 U8.3
NetR3_1: R3.1 U7.2
NetR15_1: R15.1 U20.47 | length 79.3
  Top01 w5: U20.47 1254.54,863.39 R15.1@1255,862.92
NetR16_1: R16.1 U20.14
NetR17_1: R17.1 U20.12
NetR23_1: R23.1 R44.2 U8.5 | length 78.6
  Top01 w5: R23.1 3304.08,1325 R44.2
nOE: U1.H1 U20.28 | length 14.6
  Top01 w5: 2750,1625 2750.39,1624.61 2750.39,1613.51 U1.H1
nRESET: J1.35 R3.2 U1.M14 | length 18.9
  Top01 w5: U1.M14 2627,1202 v1(2640,1215)
nSYSRESET: J2.27 U1.G4 | length 17.6
  Top01 w5: U1.G4 2783.95,1518.95 2795,1530
nTRST: J1.64 U1.H17 | length 17.7
  Top01 w5: U1.H17 2752.51,1107.51 2765,1120
nWE: U1.R4 U16.16 U20.11 | length 18
  Top01 w5: 2520,1530 2531.98,1518.02 U1.R4
P0.2: J1.44 U1.M17 | length 23.7
  Top01 w5: U1.M17 2638.95,1120 2645,1120
P0.3: J1.45 U1.M18 | length 19.6
  Top01 w5: U1.M18 2626.46,1076.46 2640,1090
P0.4: J1.37 U1.L15 | length 19.5
  Top01 w5: U1.L15 2657.96,1172.96 2670,1185
P0.5: J1.40 U1.L16 | length 16.6
  Top01 w5: U1.L16 2659.01,1139.01 2670,1150
P0.6: J1.46 U1.L18 | length 19
  Top01 w5: U1.L18 2657.96,1077.96 2670,1090
P0.7: J1.58 U1.L17 | length 17.5
  Top01 w5: U1.L17 2657.96,1107.96 2670,1120
RTCK: J1.61 U1.H18 | length 19.2
  Top01 w5: U1.H18 2752.45,1077.45 2765,1090
SCK0: J2.50 U1.C9 | length 14.7
  Top01 w5: U1.C9 2909.93,1359.93 2920,1370
SCK1: J2.74 U1.B10 | length 15.6
  Top01 w5: U1.B10 2941.43,1330.89 2950,1339.47 2950,1340
SCL1: J2.40 RP1.3 U1.A5 | length 19.5
  Top01 w5: U1.A5 2972.92,1487.92 2985,1500
SCL2: J2.38 RP1.1 U1.A3 | length 16.9
  Top01 w5: U1.A3 2973.46,1548.46 2985,1560
SDA1: J2.41 RP1.4 U1.B6 | length 18.1
  Top01 w5: U1.B6 2943.97,1453.97 2955,1465
SDA2: J2.31 RP1.2 U1.E4 | length 18.5
  Top01 w5: U1.E4@2846.96,1516.96 2860,1530
SDR_CKE0: R48.1 U1.U3 U16.37 | length 15.3
  Top01 w5: 2460,1560 2468.98,1551.02 U1.U3
SDR_CLK: U1.T4 U16.38 | length 13.8
  Top01 w5: 2490,1525 2498.04,1516.96 U1.T4
SERVICES_N: J1.75 U1.C15 | length 14
  Top01 w5: U1.C15 2910.5,1170.5 2920,1180
SSEL0: J2.47 U1.E9 | length 17.4
  Top01 w5: U1.E9 2849.48,1359.48 2860,1370
SSEL1: J2.75 U1.B11 | length 19.2
  Top01 w5: U1.B11 2941.49,1296.49 2955,1310
TCK: J1.72 U1.H14 | length 18.2
  Top01 w5: 2740,1215 2752.45,1202.55 U1.H14
TDI: J1.67 U1.J16
TDO: J1.68 U1.J15 | length 13.2
  Top01 w5: U1.J15 2720.95,1170.95 2730,1180
TMS: J1.63 U1.G18 | length 21.8
  Top01 w5: U1.G18 2786.02,1076.02 2800,1090
U1_RX: J1.39 U1.K15 | length 14.5
  Top01 w5: U1.K15 2690.5,1170.5 2700,1180
U1_TX: J1.42 U1.K16 | length 15.4
  Top01 w5: U1.K16 2689.46,1139.46 2700,1150
U2_RX: J1.57 U1.K18 | length 21.3
  Top01 w5: U1.K18 2691.02,1076.02 2705,1090
U2_TX: J1.60 U1.K17 | length 16.9
  Top01 w5: U1.K17 2689.46,1109.46 2700,1120
U3_RX: J1.70 U1.J14 | length 17.5
  Top01 w5: 2710,1215 2720.95,1204.05 U1.J14
U3_TX: J1.62 U1.J17 | length 19.2
  Top01 w5: U1.J17 2722.51,1107.51 2735,1120
U4_TX: J2.82 U1.A13 | length 16.8
  Top01 w5: U1.A13 2973.5,1233.5 2985,1245
U5_RX: J1.66 U1.F18 | length 20.4
  Top01 w5: U1.F18 2816.02,1076.02 2830,1090
U5_TX: J1.69 U1.H15 | length 19.7
  Top01 w5: U1.H15 2752.45,1172.45 2765,1185
U6_RX: J1.65 U1.F17 | length 19.7
  Top01 w5: U1.F17 2817.51,1107.51 2830,1120
U6_TX: J1.71 U1.G16 | length 15.6
  Top01 w5: U1.G16 2784.01,1139.01 2795,1150
pads on no net: U1.A4 U1.A6 U1.A7 U1.A8 U1.B4 U1.B5 U1.B7 U1.B8 U1.B15 U1.B17 U1.C1 U1.C2 U1.C4 U1.C5 U1.C6 U1.C7 U1.C8 U1.C11 U1.C17 U1.C18 U1.D1 U1.D2 U1.D5 U1.D6 U1.D7 U1.D8 U1.D9 U1.D11 U1.D14 U1.D15 U1.D16 U1.D17 U1.D18 U1.E1 U1.E2 U1.E3 U1.E5 U1.E6 U1.E7 U1.E8 U1.E10 U1.E12 U1.E14 U1.E15 U1.E16 U1.E17 U1.E18 U1.F1 U1.F2 U1.F3 U1.F14 U1.F15 U1.F16 U1.G1 U1.G2 U1.G3 U1.G14 U1.G15 U1.G17 U1.H2 U1.H3 U1.H4 U1.H16 U1.J1 U1.J2 U1.J3 U1.J4 U1.L2 U1.M15 U1.M16 U1.N17 U1.N18 U1.P5 U1.P12 U1.R9 U1.R10 U1.R12 U1.R13 U1.T1 U1.T3 U1.T9 U1.T10 U1.T11 U1.T13 U1.T14 U1.U2 U1.U9 U1.U10 U1.U11 U1.U12 U1.U14 U1.U15 U1.U16 U1.U17 U1.V8 U1.V9 U1.V10 U1.V11 U1.V12 U1.V13 U1.V14 U1.V15 U1.V16 U7.3 U16.40 U20.10 U20.13 U20.15 Y1.3 Y1.4 Y2.3 Y2.4

## Polygon pours and split planes (outlines as drawn)
3V3 on Top01 "Top01-3V3" (solid, pour order 0): 3143,1044 3113,1014 3113,828 3151,790 3155,794 3187,794 3187,844 3182,849 3190,857 3210,857 3210,945 3189,966 3178,966 3173,971 3173,1044 3144,1044 3143,1043
GND on Bottom04 (solid, pour order 6): 2409,1342 2410,1346 2471,1346 2471,1242 2470,1241 2409,1241
no net on GND02 (split plane): 3564.9,20.1 20.1,20.1 20.1,2619.9 3564.9,2619.9
no net on PWR03 (split plane): 3564.9,20.1 20.1,20.1 20.1,2619.9 3564.9,2619.9

## Silkscreen, mask and mechanical layers (free items; w line width, h text height)
Mechanical 1:
  the board outline again, w10

## Text inside footprints (layer, text, board x,y; h text height)
U1: Top Overlay "1" at 3010.88,1600.98 h40; Top Overlay "A" at 2960.88,1655.98 h40